# Altium PCB 1071.PcbDoc
Units mil, origin at the board's own origin, x right, y up, seen from the top; angles counter-clockwise.
Board outline 4010 x 1410 mil, 2 copper layers (Top Layer, Bottom Layer); 14 components, 25 nets, 54 pads, 4 vias.
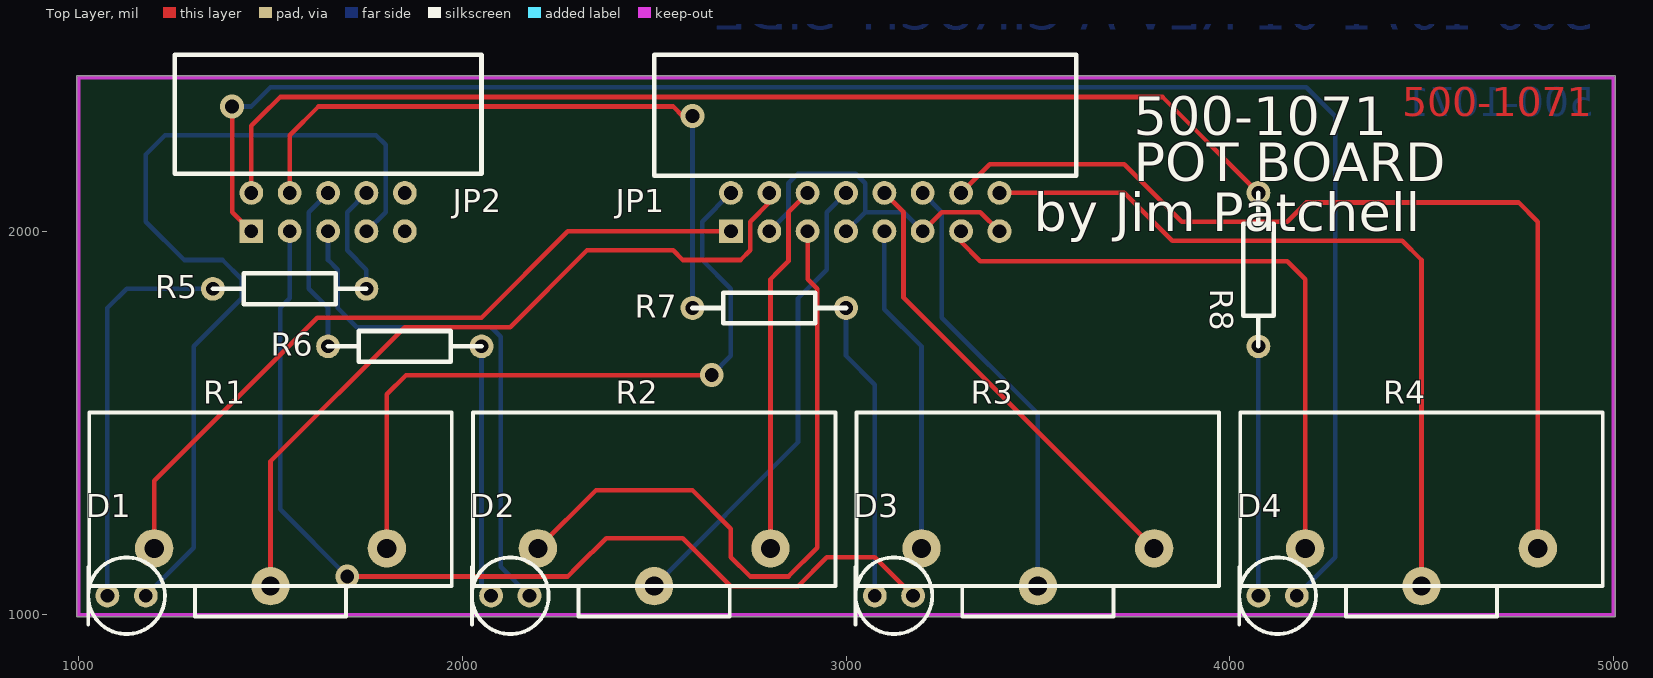
[diagram p0: Top Layer view]
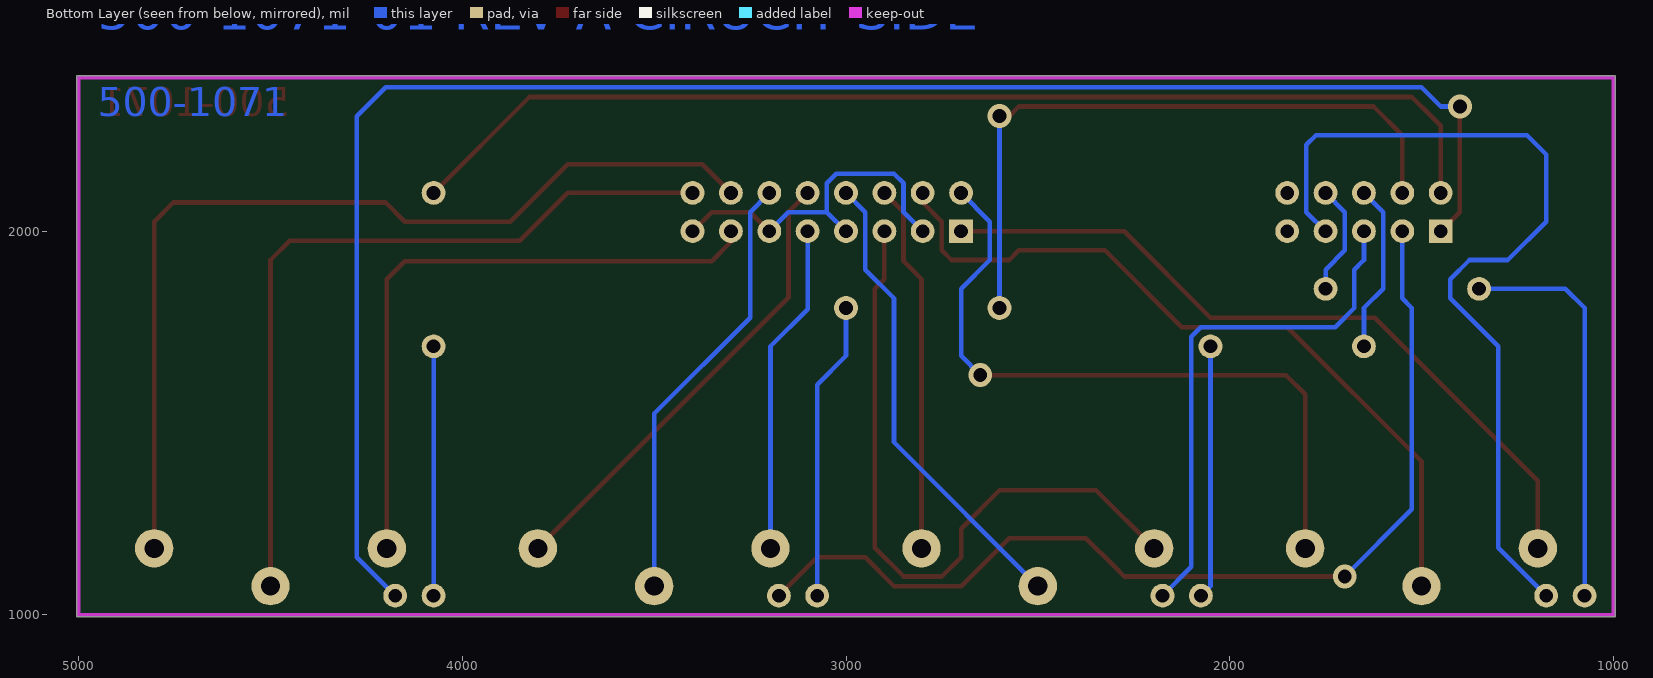
[diagram p1: Bottom Layer view, seen from below]

## Layer stack, top to bottom
Top Layer: signal copper 1.4
Dielectric: dielectric 12.6, FR-4, Dk 4.8
Bottom Layer: signal copper 1.4

## Board outline
995,995 5005,995 5005,2405 995,2405

## Design rules (kind name [scope] priority, off if disabled: settings)
Clearance [All] p1: gap=10
PlaneClearance [All] p1: clearance=10
PolygonConnect [All] p1: connectstyle=Relief reliefconductorwidth=10 reliefentries=4 polygonreliefangle="90 Angle"
RoutingPriority [All] p1: routingpriority=2
RoutingVias [All] p1: holewidth=20 width=50 viastyle="Through Hole" minholewidth=28 minwidth=50 maxholewidth=28 maxwidth=50
SilkscreenOverComponentPads [All] p1: minsilkscreentomaskgap=10
SolderMaskExpansion [All] p1: expansion=2
TestPointUsage [All] p1: valid=0 allowmultiple=FALSE
Testpoint [All] p1: side=15 testpointundercomponent=TRUE minsize=40 maxsize=100 preferedsize=60 minholesize=0 maxholesize=40 preferedholesize=32 testpointgrid=1 style=1023 order=0123456789
Width [All] p1: maxlimit=10 minlimit=10 preferedwidth=10
21 further rules are at their usual default settings.

## Components (designator, comment, footprint, x,y, rotation, side; value= is the part's Value field where it differs from the comment)
D1 "LED" LED 1125,1050 r0 top
D2 "LED" LED 2125,1050 r0 top
D3 "LED" LED 3125,1050 r0 top
D4 "LED" LED 4125,1050 r0 top
JP1 "HEADER 8X2" IDC16-AMP-RA 2700,2000 r0 top
JP2 "HEADER 5X2" IDC10-AMP-RA 1450,2000 r0 top
R1 "POT" "ALPHA POT V" 1500,1075 r0 top
R2 "POT" "ALPHA POT V" 2500,1075 r0 top
R3 "POT" "ALPHA POT V" 3500,1075 r0 top
R4 "POT" "ALPHA POT V" 4500,1075 r0 top
R5 "R" AXIAL0.4 1350,1850 r0 top
R6 "R" AXIAL0.4 2050,1700 r180 top
R7 "R" AXIAL0.4 3000,1800 r180 top
R8 "R" AXIAL0.4 4075,1700 r90 top

## Footprints (in the part's own frame and the unit in brackets; to place one, negate y for a bottom-side part, rotate by r counter-clockwise, add the part's x,y. Pads: shape width x height; smd on the part's side, far side on the other; paste and mask are expansions set on the pad)
"ALPHA POT V" [mm]
  round 2.54 hole 1.27: A(7.7,2.5) B(-7.7,2.5) WIPE(0,0)
  silkscreen extent -12,-2 12,11.5
AXIAL0.4 [mil]
  round 62 hole 36: 1(0,0) 2(400,0)
  silkscreen extent 0,-40 400,40
IDC10-AMP-RA [mil]
  rect 62x62 hole 36: 1(0,0)
  round 62 hole 36: 2(0,100) 3(100,0) 4(100,100) 5(200,0) 6(200,100) 7(300,0) 8(300,100) 9(400,0) 10(400,100)
  silkscreen extent -200,150 600,460
IDC16-AMP-RA [mil]
  rect 62x62 hole 36: 1(0,0)
  round 62 hole 36: 2(0,100) 3(100,0) 4(100,100) 5(200,0) 6(200,100) 7(300,0) 8(300,100) 9(400,0) 10(400,100) 11(500,0) 12(500,100) 13(600,0) 14(600,100) 15(700,0) 16(700,100)
  silkscreen extent -200,145 900,460
LED [mil]
  round 62 hole 36: ANOD(50,0) CATH(-50,0)
  silkscreen extent -100,-100 100,100

## Via types
v1: diameter 62, hole 36, Top Layer to Bottom Layer, 4 vias

## Nets (pads, with @x,y where several pads share a name; then routed paths per layer and width w, separated by ;. In a path a pad name is that pad's centre, name@x,y a point inside that pad or via, vN(x,y) a via of type N, cw(c..) or ccw(c..) an arc to the next point about the centre after c; other vN are vias at no path point)
HIGH1: JP1.2 R1.A | length 1827
  Top Layer w12: R1.A 1803.15,1575 1853.15,1625 v1(2650,1625)
  Bottom Layer w12: v1(2650,1625) 2700,1675 2700,1850 2625,1925 2625,2025 JP1.2
HIGH2: JP1.6 R2.A | length 966.7
  Top Layer w12: R2.A 2803.15,1875 2825,1896.85 2850,1921.85 2850,2050 JP1.6
HIGH3: JP1.10 R3.A | length 1217.8
  Top Layer w12: JP1.10 3150,2050 3150,1826.57 R3.A
HIGH4: JP1.14 R4.A | length 2489.3
  Top Layer w12: JP1.14 3375,2175 3725,2175 3875,2025 4150,2025 4200,2075 4753.15,2075 4803.15,2025 R4.A
LOW1: JP1.1 R1.B | length 1949
  Top Layer w12: R1.B 1196.85,1350 1621.85,1775 2050,1775 2275,2000 JP1.1
LOW2: JP1.5 R2.B | length 1794.5
  Top Layer w12: R2.B 2348.43,1325 2600,1325 2700,1225 2700,1150 2750,1100 2850,1100 2925,1175 2925,1850 2900,1875 JP1.5
LOW3: JP1.9 R3.B | length 866.7
  Bottom Layer w12: JP1.9 3100,1796.85 3196.85,1700 R3.B
LOW4: JP1.13 R4.B | length 1666.7
  Top Layer w12: JP1.13 3300,1971.85 3350,1921.85 4150,1921.85 4196.85,1875 R4.B
N01060: JP1.3 JP1.7 JP1.11 JP1.15 | length 995
  Top Layer w12: JP1.11 3250,2050 3350,2050 JP1.15
  Bottom Layer w12: JP1.3 2850,2050 2850,2125 2875,2150 3025,2150 3050,2125 3050,2050 ; JP1.11 3150,2050 3050,2050 ; 3050,2050 JP1.7 3050,2050
N01987: D4.CATH R8.1 | length 650
  Bottom Layer w12: D4.CATH R8.1
N02014: D3.CATH R7.1 | length 781.1
  Bottom Layer w12: R7.1 3000,1675 3075,1600 D3.CATH
N02041: D2.CATH R6.1 | length 660.4
  Bottom Layer w12: R6.1 2050,1075 D2.CATH
N02068: D1.CATH R5.1 | length 1045.7
  Bottom Layer w12: D1.CATH 1075,1800 1125,1850 R5.1
N02112: D1.ANOD JP2.7 | length 2317.5
  Bottom Layer w12: D1.ANOD 1300,1175 1300,1700 1425,1825 1425,1875 1375,1925 1275,1925 1175,2025 1175,2200 1225,2250 1775,2250 1800,2225 1800,2050 JP2.7
N02162: D2.ANOD JP2.5 | length 1372.5
  Bottom Layer w12: JP2.5 1650,1925 1675,1900 1675,1800 1725,1750 2075,1750 2100,1725 2100,1125 D2.ANOD
N02212: D3.ANOD JP2.3 | length 2623.5
  Top Layer w12: v1(1700,1100) 2275,1100 2300,1125 2375,1200 2575,1200 2700,1075 2875,1075 2950,1150 3075,1150 D3.ANOD
  Bottom Layer w12: JP2.3 1550,1825 1525,1800 1525,1275 v1(1700,1100)
N02262: D4.ANOD JP2.1 | length 4563.9
  Top Layer w12: v1(1400,2325) 1400,2050 JP2.1
  Bottom Layer w12: v1(1400,2325) 1450,2325 1500,2375 4200,2375 4275,2300 4275,1150 D4.ANOD
N02312: JP2.8 R5.2 | length 291.4
  Bottom Layer w12: R5.2 1750,1900 1700,1950 1700,2050 JP2.8
N02362: JP2.6 R6.2 | length 441.4
  Bottom Layer w12: R6.2 1650,1800 1600,1850 1600,2050 JP2.6
N02412: JP2.4 R7.2 | length 1741.4
  Top Layer w12: JP2.4 1550,2250 1625,2325 2550,2325 2575,2300 v1(2600,2300)
  Bottom Layer w12: R7.2 v1(2600,2300)
N02477: JP2.2 R8.2 | length 2934.6
  Top Layer w12: JP2.2 1450,2275 1475,2300 1525,2350 3825,2350 R8.2
WIPE1: JP1.4 R1.WIPE | length 1994.2
  Top Layer w12: R1.WIPE 1500,1400 1850,1750 2125,1750 2325,1950 2550,1950 2575,1925 2700,1925 2725,1925 2750,1950 2750,2025 2800,2075 JP1.4
WIPE2: JP1.8 R2.WIPE | length 1232.1
  Bottom Layer w12: R2.WIPE 2875,1450 2875,1825 2950,1900 2950,2050 JP1.8
WIPE3: JP1.12 R3.WIPE | length 1149.3
  Bottom Layer w12: JP1.12 3250,2050 3250,1775 3500,1525 R3.WIPE
WIPE4: JP1.16 R4.WIPE | length 2022.5
  Top Layer w12: JP1.16 3725,2100 3850,1975 4450,1975 4500,1925 R4.WIPE
pads on no net: JP2.9 JP2.10

## Keep-outs
Keep-Out Layer:
  lines w10: 1000,1000 1000,2400 5000,2400 5000,1000 1000,1000

## Other copper
Top Layer:
  text "500-1071-02 REV A COMPONENT SIDE" at 2075,2650 h100
  text "500-1071" at 4450,2300 h75
Bottom Layer:
  text "500-1071-01 REV A CIRUCIT SIDE" at 4950,2525 h100
  text "500-1071" at 4950,2300 h75

## Silkscreen, mask and mechanical layers (free items; w line width, h text height)
Top Overlay:
  text "500-1071-04 REV A COMPONENT LEGEND" at 2075,2900 h100
  text "500-1071" at 3750,2250 h100
  text "POT BOARD" at 3750,2130 h100
  text "by Jim Patchell" at 3490,2000 h100
Bottom Solder:
  text "500-1071-03 REV A TOP BOTTOM SOLDER MASK" at 2075,2775 h100
Mechanical 1:
  lines w10: 1000,1000 1000,2400 5000,2400 5000,1000 1000,1000
Drill Drawing:
  lines w10: 1000,1000 1000,2400 5000,2400 5000,1000 1000,1000
  lines w12: 1000,600 1000,800 ; 1091.87,669.38 1000,700 ; 1091.87,730.62 1000,700 ; 2724.55,700 1000,700 ; 3275.45,700 5000,700 ; 4908.13,669.38 5000,700 ; 4908.13,730.62 5000,700 ; 5000,600 5000,800 ; 5100,1000 5300,1000 ; 5100,2400 5300,2400 ; 5169.38,1091.87 5200,1000 ; 5169.38,2308.13 5200,2400 ; 5200,1431.64 5200,1000 ; 5200,1968.36 5200,2400 ; 5230.62,1091.87 5200,1000 ; 5230.62,2308.13 5200,2400
  text "500-1071-05 REV A FAB DRAWING" at 2075,3025 h100
  text ".LEGEND" at 5400,2350 h100
  text "1400mil" at 5154.07,1958.36 h85 r270
  text "4000mil" at 2734.55,654.07 h85